# Altium PCB pcb.PcbDoc
Units mil, origin at the board's own origin, x right, y up, seen from the top; angles counter-clockwise.
Board outline 1435 x 2068 mil, 2 copper layers (Top Layer, Bottom Layer); 34 components, 70 nets, 198 pads, 6 vias.
Unrouted connection lines stored in the file: 12.
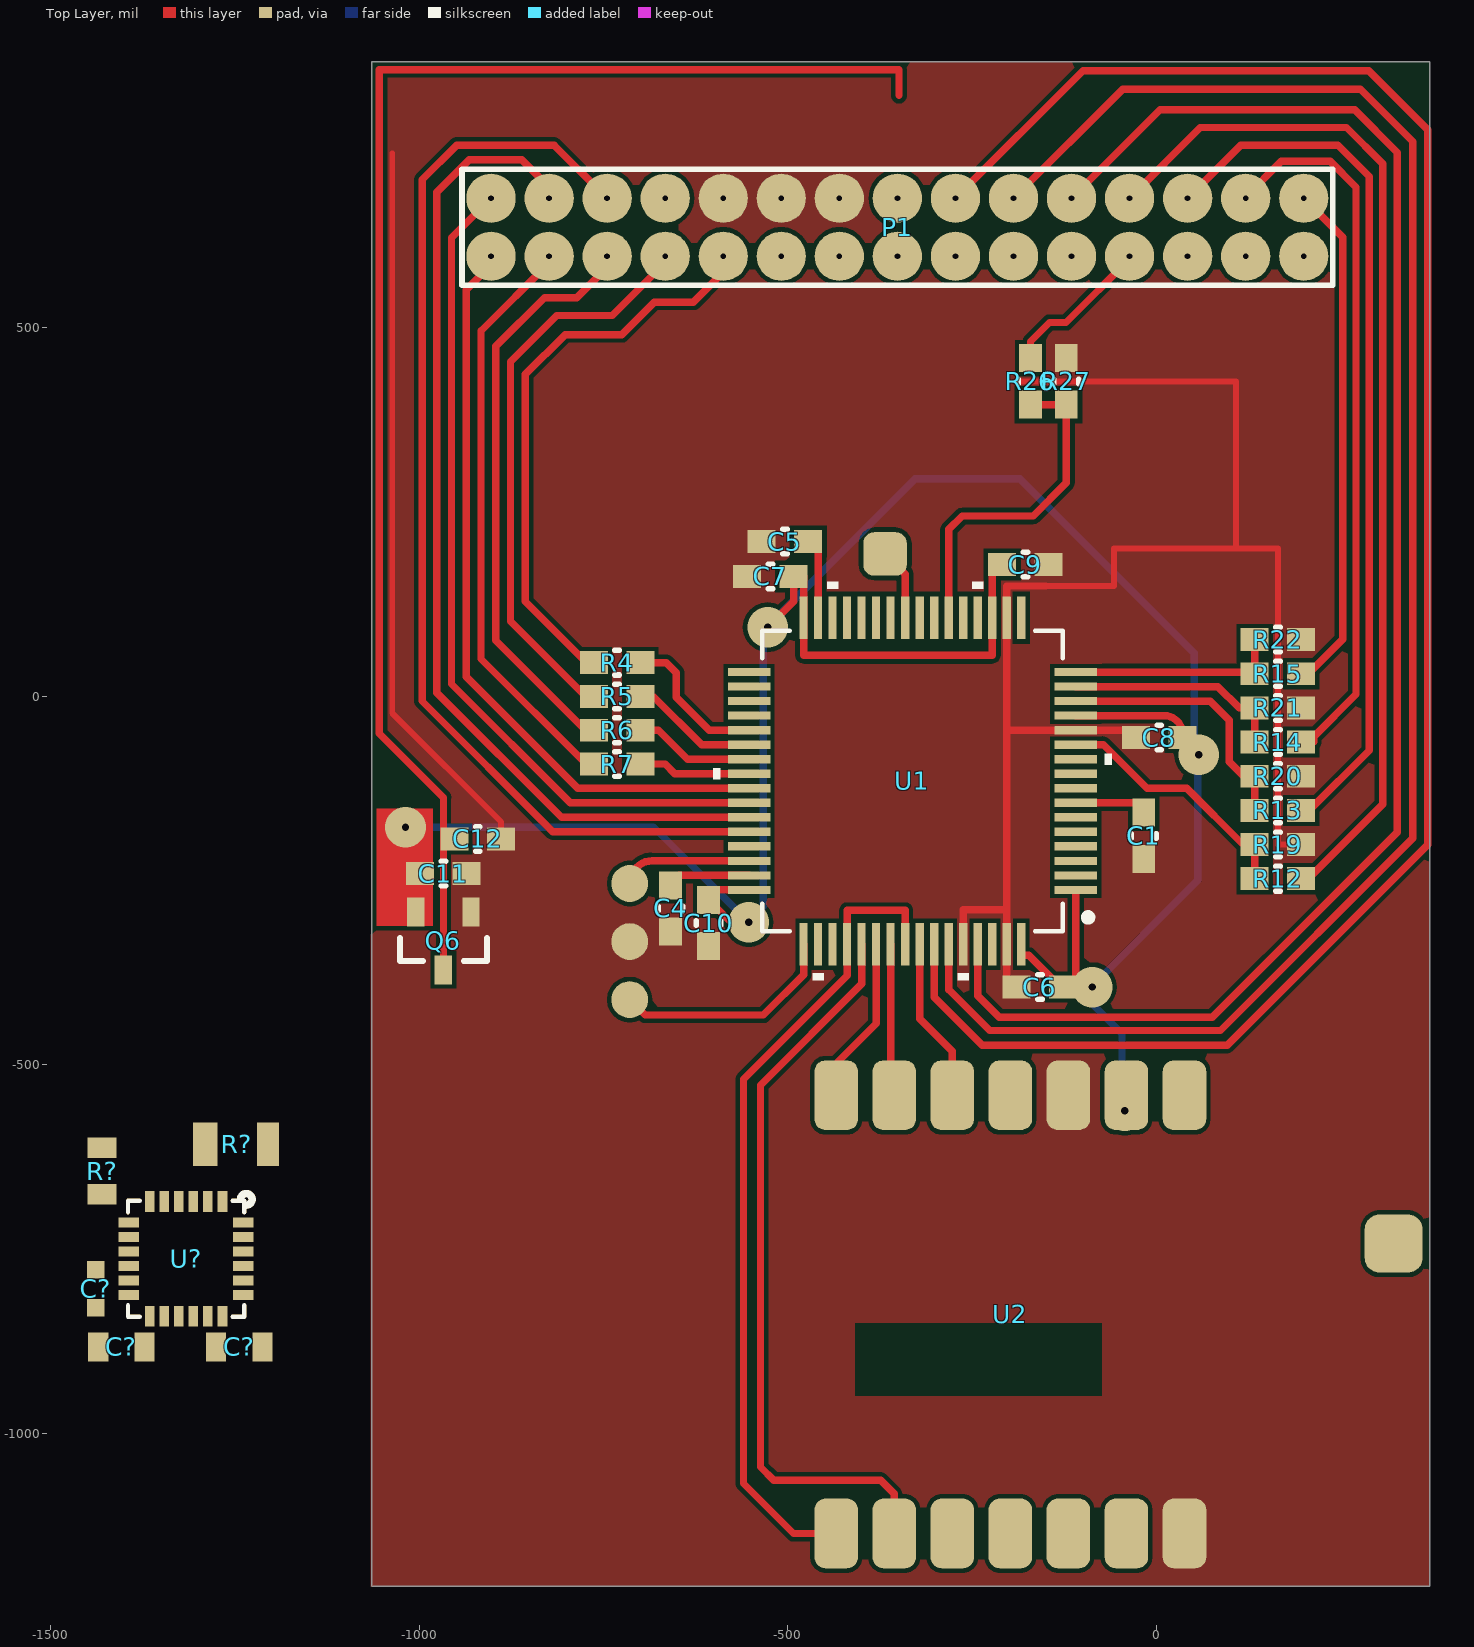
[diagram p0: Top Layer view]
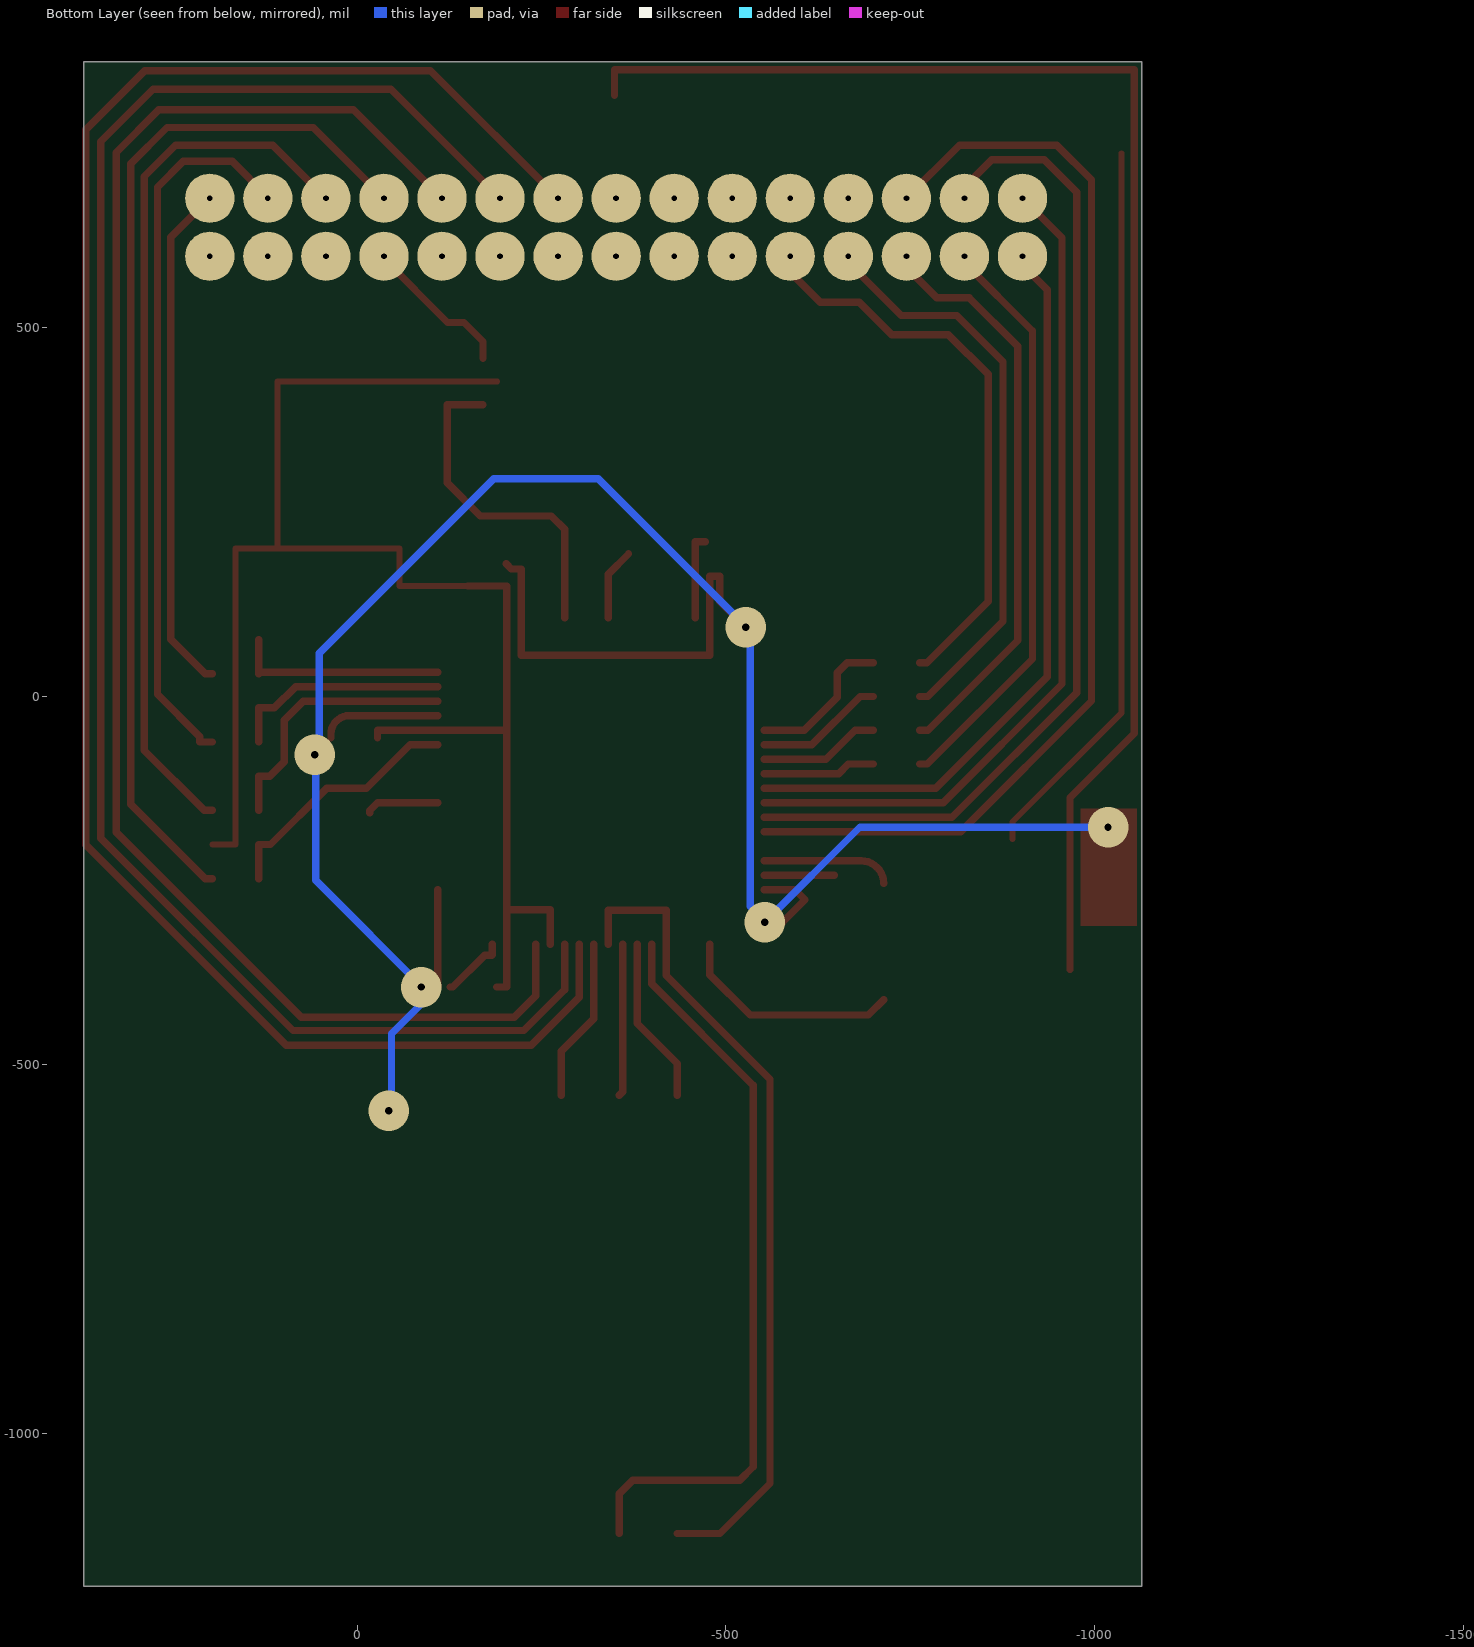
[diagram p1: Bottom Layer view, seen from below]

## Layer stack, top to bottom
Top Solder: solder mask 0.4, Solder Resist, Dk 3.5
Top Layer: signal copper 1.4
Dielectric 1: dielectric 12.6, FR-4, Dk 4.8
Bottom Layer: signal copper 1.4
Bottom Solder: solder mask 0.4, Solder Resist, Dk 3.5

## Board outline
-1064,-1207 -1064,861 371,861 371,-1207

## Design rules (kind name [scope] priority, off if disabled: settings)
Clearance [All] p1: gap=6 ignorepadtopadclearanceinfootprint=FALSE
PolygonConnect [All] p1: connectstyle=Direct reliefconductorwidth=10 reliefentries=4 polygonreliefangle="90 Angle" airgapwidth=10
RoutingVias [All] p1: holewidth=28 width=50 viastyle="Through Hole" minholewidth=28 minwidth=50 maxholewidth=28 maxwidth=50
SolderMaskExpansion [All] p1: expansion=4
Width [All] p1: maxlimit=500 minlimit=2 preferedwidth=10
30 further rules are at their usual default settings.

## Classes and differential pairs
component class main: C1 C4 C5 C6 C7 C8 C9 C10 C11 C12 C? P1 Q6 R4 R5 R6 R7 R12 R13 R14 R15 R19 R20 R21 R22 R26 R27 R? U1 U2 U?

## Components (designator, comment, footprint, x,y, rotation, side; value= is the part's Value field where it differs from the comment)
C1 "Cap" RC_0603 -16.91,-189.35 r90 top value=100pF
C4 "Cap" RC_0603 -658.91,-287.77 r90 top value=100pF
C5 "Cap" RC_0603 -503.65,209.87 r0 top value=100pF
C6 "Cap" RC_0603 -157.74,-394.32 r0 top value=100pF
C7 "Cap" RC_0603 -523.33,162.68 r0 top value=100pF
C8 "Cap" RC_0603 4.09,-55.92 r0 top value=100pF
C9 "Cap" RC_0603 -177.43,178.68 r180 top value=100pF
C10 "Cap" RC_0603 -607.28,-307.46 r90 top value=100pF
C11 "Cap" RC_0603 -966.91,-240.32 r180 top value=100pF
C12 "Cap" RC_0603 -920.41,-193.32 r180 top value=100pF
C? "Cap402" 0402x -1438.83,-803.56 r270 top value=100nF
C? "Cap603" 0603x -1243.83,-882.56 r0 top value=2.2nF
C? "Cap402" 0603x -1403.83,-882.56 r0 top value=100nF
P1 "Header 15X2" HDR2X15-2mm -351.15,636.31 r180 top
Q6 "IRLML2502" RR_SOT-23 -966.91,-331.64 r270 top value="MOSFET N-CH 20V 4.2A SOT-23-3"
R4 "Res1" RR_0603 -731.41,45.68 r180 top value=1K
R5 "Res1" RR_0603 -731.41,-0.15 r180 top value=1K
R6 "Res1" RR_0603 -731.41,-45.99 r180 top value=1K
R7 "Res1" RR_0603 -731.41,-91.82 r180 top value=1K
R12 "Res1" RR_0603 165.09,-247.32 r0 top value=1K
R13 "Res1" RR_0603 165.09,-154.65 r0 top value=1K
R14 "Res1" RR_0603 165.09,-61.99 r0 top value=1K
R15 "Res1" RR_0603 165.09,30.68 r0 top value=1K
R19 "Res1" RR_0603 165.09,-200.99 r180 top value=1K
R20 "Res1" RR_0603 165.09,-108.32 r180 top value=1K
R21 "Res1" RR_0603 165.09,-15.65 r180 top value=1K
R22 "Res1" RR_0603 165.09,77.01 r180 top value=1K
R26 "Res1" RR_0603 -170.63,427.18 r90 top value=1K
R27 "Res1" RR_0603 -122.09,427.18 r270 top value=1K
R? "Res1" 0805x -1247.83,-607.56 r180 top value=1K
R? "Res1" 0603x -1430,-644 r270 top value=1K
U1 "STM32F405RGT6" RR_LQFP-64 -330.69,-114.82 r180 top value="IC MCU 32BIT 1MB FLASH 64LQFP"
U2 "RFM12B" RFM12B -197.91,-838.32 r90 top
U? "MPU-6000" IMU-3000 -1316,-763 r270 top

## Footprints (in the part's own frame and the unit in brackets; to place one, negate y for a bottom-side part, rotate by r counter-clockwise, add the part's x,y. Pads: shape width x height; smd on the part's side, far side on the other; paste and mask are expansions set on the pad)
0402x [mm] "Chip Capacitor, Body 1.0x0.5mm, IPC Medium Density"
  rect 0.6x0.6 smd: 1(-0.66,0) 2(0.66,0)
  body extent -0.5,-0.25 0.5,0.25, height 0.6
0603x [mm] "Chip Resistor; Body 1.6 x 0.8 mm (LxW typ)"
  rect 0.7x1 smd: 1(-0.8,0) 2(0.8,0)
0805x [mil] "Chip Resistor; Body 2 x 1.3 mm (LxW typ)"
  rect 33x59.06 smd: 1(42,0)
  rect 30x59.06 smd: 2(-43,0)
HDR2X15-2mm [mm] "Connector; Header; 30x2 Position"
  round 1.7 hole 0.2: 1(-14,-1) 2(-14,1) 3(-12,-1) 4(-12,1) 5(-10,-1) 6(-10,1) 7(-8,-1) 8(-8,1) 9(-6,-1) 10(-6,1) 11(-4,-1) 12(-4,1) 13(-2,-1) 14(-2,1) 15(0,-1) 16(0,1) 17(2,-1) 18(2,1) 19(4,-1) 20(4,1) 21(6,-1) 22(6,1) 23(8,-1) 24(8,1) 25(10,-1) 26(10,1) 27(12,-1) 28(12,1) 29(14,-1) 30(14,1)
  silkscreen extent -15,-2 15,2
IMU-3000 [mm]
  rect 0.711x0.337 smd paste-0.03 mask+0.04: 1(-1.975,1.25) 2(-1.975,0.75) 3(-1.975,0.25) 4(-1.975,-0.25) 5(-1.975,-0.75) 6(-1.975,-1.25) 13(1.975,-1.25) 14(1.975,-0.75) 15(1.975,-0.25) 16(1.975,0.25) 17(1.975,0.75) 18(1.975,1.25)
  rect 0.337x0.711 smd paste-0.03 mask+0.04: 7(-1.25,-1.975) 8(-0.75,-1.975) 9(-0.25,-1.975) 10(0.25,-1.975) 11(0.75,-1.975) 12(1.25,-1.975) 19(1.25,1.975) 20(0.75,1.975) 21(0.25,1.975) 22(-0.25,1.975) 23(-0.75,1.975) 24(-1.25,1.975)
  silkscreen extent -2.25,-2 2,2.27, body extent -2,-2 2,2, height 0.95
RC_0603 [mil] "Chip Capacitor"
  rect 38x31 smd: 1(-31.5,0) 2(31.5,0)
  silkscreen extent -3,-17 3,17, body extent -33,-18 33,18, height 35
RFM12B [mm]
  rrect50% 2.4x1.5 smd: 1(-7.55,6) 2(-7.55,4) 3(-7.55,2) 4(-7.55,0) 5(-7.55,-2) 6(-7.55,-4) 7(-7.55,-6) 8(7.55,-6) 9(7.55,-4) 10(7.55,-2) 11(7.55,0) 12(7.55,2) 13(7.55,4) 14(7.55,6)
  Top Layer pour cut-out: -2.8,-3.15 -0.3,-3.15 -0.3,5.35 -2.8,5.35
  body extent -7.95,-8.05 7.95,8.05, height 0.25
RR_0603 [mil] "Chip Resistor; Body 1.6 x 0.8 mm (LxW typ)"
  rect 38x31 smd: 1(-31.5,0) 2(31.5,0)
  silkscreen extent -3,-17 3,17, body extent -33,-18 33,18, height 22
RR_LQFP-64 [mil]
  rect 58x11 smd: 1(-221.5,147.64) 2(-221.5,127.95) 3(-221.5,108.27) 4(-221.5,88.58) 5(-221.5,68.9) 6(-221.5,49.21) 7(-221.5,29.53) 8(-221.5,9.84) 9(-221.5,-9.84) 10(-221.5,-29.53) 11(-221.5,-49.21) 12(-221.5,-68.9) 13(-221.5,-88.58) 14(-221.5,-108.27) 15(-221.5,-127.95) 16(-221.5,-147.64) 33(221.5,-147.64) 34(221.5,-127.95) 35(221.5,-108.27) 36(221.5,-88.58) 37(221.5,-68.9) 38(221.5,-49.21) 39(221.5,-29.53) 40(221.5,-9.84) 41(221.5,9.84) 42(221.5,29.53) 43(221.5,49.21) 44(221.5,68.9) 45(221.5,88.58) 46(221.5,108.27) 47(221.5,127.95) 48(221.5,147.64)
  rect 11x58 smd: 17(-147.64,-221.5) 18(-127.95,-221.5) 19(-108.27,-221.5) 20(-88.58,-221.5) 21(-68.9,-221.5) 22(-49.21,-221.5) 23(-29.53,-221.5) 24(-9.84,-221.5) 25(9.84,-221.5) 26(29.53,-221.5) 27(49.21,-221.5) 28(68.9,-221.5) 29(88.58,-221.5) 30(108.27,-221.5) 31(127.95,-221.5) 32(147.64,-221.5) 49(147.64,221.5) 50(127.95,221.5) 51(108.27,221.5) 52(88.58,221.5) 53(68.9,221.5) 54(49.21,221.5) 55(29.53,221.5) 56(9.84,221.5) 57(-9.84,221.5) 58(-29.53,221.5) 59(-49.21,221.5) 60(-68.9,221.5) 61(-88.58,221.5) 62(-108.27,221.5) 63(-127.95,221.5) 64(-147.64,221.5)
  silkscreen extent -271,-270 270,270, body extent -236,-236 236,236, height 59
RR_SOT-23 [mm] "SOT23, 3-Leads, Body 2.9x1.3mm, Pitch 0.95mm, Lead Span 2.3mm, IPC High Density"
  rect 1x0.6 smd: 1(-1,0.95) 2(-1,-0.95) 3(1,0)
  silkscreen extent -0.1,-1.5 0.7,1.5, body extent -1.33,-1.5 1.27,1.5, height 1.1

## Part data
C1 C4 C5 C6 C7 C8 C9 C10 C11 C12: "Capacitor", LatestRevisionDate=17-Jul-2002, LatestRevisionNote="Re-released for DXP Platform.", PackageDescription="Radial Cap, Thru-Hole; 2 Leads; 0.3 in Pin Spacing", PackageReference=RAD-0.3, Published=8-Jun-2000, Publisher="Altium Limited"
C? C?: "Capacitor SMD", Supplier Part Number 1=445-4952-1-ND, ComponentLink2Description=Datasheet, LatestRevisionDate=1-Nov-2010, LatestRevisionNote="Released OpenPilot Lib", PackageReference="0402 (1005 Metric)", Published=1-Nov-2010, Publisher="The OpenPilot Project", Supplier 1=Digi-Key
C?: "Capacitor SMD", Supplier Part Number 1=445-1309-1-ND, LatestRevisionDate=1-Nov-2010, LatestRevisionNote="Released OpenPilot Lib", PackageReference="0603 (1608 Metric)", Published=1-Nov-2010, Publisher="The OpenPilot Project", Supplier 1=Digi-Key
P1: "Header, 15-Pin, Dual row", LatestRevisionDate=17-Jul-2002, LatestRevisionNote="Re-released for DXP Platform.", Publisher="Altium Limited"
Q6: "MOSFET N-CH 20V 4.2A SOT-23-3", Manufacturer="Infineon Technologies", Package=SOT-23, Cost=0,52, Order Number="IRLML2502GTRPBF ( IRLML6246TRPBF (INFIN))"
R4 R5 R6 R7 R12 R13 R14 R15 R19 R20 R21 R22 R26 R27 R? R?: "Resistor", LatestRevisionDate=17-Jul-2002, LatestRevisionNote="Re-released for DXP Platform.", PackageDescription="Axial Device, Thru-Hole; 2 Leads; 0.3 in Pin Spacing", PackageReference=AXIAL-0.3, Published=8-Jun-2000, Publisher="Altium Limited"
U1: "MCU STM32F405RGT6", Manufacturer="ST Microelectronics", Package=64-LQFP, Cost=10,58, Order Number=STM32F405RGT6
U2: library part Component_1
U?: library part MPU-3/6000, "Invensense MPU-3/6000,  3-axis Gyros & Accel on 6000", Manufacturer=Invensense, ComponentLink2Description=Datasheet, LatestRevisionDate=1-Nov-2010, LatestRevisionNote="Released OpenPilot Lib", Published=1-Nov-2010, Publisher="The OpenPilot Project", Supplier 1=Invensense, Supplier Part Number 1=MPU-6000

## Free pads (board coordinates)
  round 50 smd: 1(-714.24,-411.36) 1(-714.24,-332.62) 1(-714.24,-253.88)
  rrect50% 59.06x59.06 smd: 2(-367.91,193.18)
  rrect50% 78.74x78.74 smd: 2(322.09,-742.32)

## Via types
v1: diameter 55, hole 10, Top Layer to Bottom Layer, 6 vias

## Nets (pads, with @x,y where several pads share a name; then routed paths per layer and width w, separated by ;. In a path a pad name is that pad's centre, name@x,y a point inside that pad or via, vN(x,y) a via of type N, cw(c..) or ccw(c..) an arc to the next point about the centre after c; other vN are vias at no path point)
3.3V: C?.2@-1372.33,-882.56 U?.13
3V3: C6.2 C7.2 C8.2 C9.2 C10.2 C11.2 Q6.2 U1.1 U1.13 U1.19 U1.32 U1.48 U1.64 U2.9 | length 3508.5
  Top Layer w10: v1@-1006.91,-177.32 v1@-1004.31,-179.92 ; v1(-552.91,-306.32) -576.92,-306.32 C10.2 -593.78,-262.46 U1.48 ; v1(-526.91,93.68) -491.83,128.75 C7.2 -478.33,162.68 U1.32 -478.33,55.68 -222.43,55.68 U1.19 -222.43,172.68 -208.93,172.68 C9.2@-201.91,179.7 ; U1.64 -183.06,-350.46 -182.56,-350.96 -173.1,-350.96 -129.74,-394.32 C6.2 ; C6.2@-109.19,-394.32 U1.1 ; U1.13 11.09,-26.24 cw(c11.09,-50.74) 35.59,-50.74 C8.2
  Bottom Layer w10: v1(-1018.41,-177.32) -681.91,-177.32 -553.61,-305.61 v1(-552.91,-306.32) ; v1@-559,-311 -533,-285 -533,89 -327,295 -185,295 51.5,58.5 v1@51.5,-84.1 ; v1@-46.52,-545.76 -46.52,-457.48 -101,-403 -97,-399 -93,-399 56.5,-249.5 v1@56.5,-84.1
  other v1: -42.91,-562.32 -86.91,-394.32 57.59,-79.42
5V: C12.2 P1.15 Q6.3 | length 1997
  Top Layer w9: Q6.3 -966.91,-137.32
  Top Layer w10: -966.91,-137.32 -1053.91,-50.32 -1053.91,850 -349,850 -349,815
_FAN0: P1.18
_FAN1: P1.20
_LED0: P1.14
_LED1: P1.16
_LED2: P1.23
_SAIN0: P1.7 R12.2 | length 1424.7
  Top Layer w10: P1.7 59.81,771.68 258.09,771.68 307.09,722.68 307.09,-146.32 206.1,-247.32 R12.2
_SAIN1: P1.5 R13.2 | length 1198.5
  Top Layer w10: P1.5 114.55,747.68 246.47,747.68 289.03,705.12 289.03,-73.39 207.76,-154.65 R13.2
_SAIN2: P1.3 R14.2 | length 979.3
  Top Layer w10: P1.3 121.29,677.38 169.59,725.68 236.09,725.68 270.96,690.81 270.96,2.82 213.43,-54.71 213.43,-61.99 R14.2
_SAIN3: P1.1 R15.2 | length 695.8
  Top Layer w10: R15.2 206.09,30.68 252.89,77.48 252.89,622.82 P1.1
_SAIN4: P1.2
_SAIN5: P1.4
_SAIN6: P1.6
_VBat: P1.8 R26.2 | length 207
  Top Layer w10: R26.2 -170.63,481.32 -144.77,507.18 -122.41,507.18 -36.19,593.4 P1.8
A_C\S\: R?.1@-1289.83,-607.56
A_MISO: U?.9
A_MOSI: U?.24
A_SCK: R?.1@-1430,-612.5
ADC0: R12.1 R19.2 U1.11 | length 345.2
  Top Layer w10: U1.11 -71.62,-65.61 -12.56,-124.66 41.44,-124.66 117.76,-200.99 R19.2 R12.1
ADC1: R13.1 R20.2 U1.14 | length 364.2
  Top Layer w10: U1.14 73.33,-6.55 99.2,-32.43 99.2,-88.59 118.94,-108.32 R20.2 R13.1
ADC2: R14.1 R21.2 U1.15 | length 301
  Top Layer w10: U1.15 83.64,13.13 112.43,-15.65 R21.2 R14.1
ADC3: R15.1 R22.2 U1.16 | length 290
  Top Layer w10: U1.16 131.46,32.82 R15.1 R22.2
ADC4: U1.17
ADC5: U1.20
ADC6: U1.21
ADC7: R26.1 R27.2 U1.22 | length 460
  Top Layer w10: U1.22 -281.48,226.49 -263.29,244.68 -166.91,244.68 -122.09,289.5 R27.2 R26.1
ADC8: U1.23
ADC9: U1.24
ADC10: pad.2@-367.91,193.18 U1.25 | length 97.8
  Top Layer w10: pad.2@-367.91,193.18 -340.54,165.81 U1.25
ADC11: U1.26
ADC12: U1.27
ANT: pad.2@322.09,-742.32 U2.8
C\S\: U1.54 U2.14 | length 227.2
  Top Layer w10: U2.14 -434.13,-498.05 -379.91,-443.83 U1.54
FAN0: U1.35
FAN1: U1.36
GND: C1.1 C4.1 C5.1 C6.1 C7.1 C8.1 C9.1 C10.1 C11.1 C12.1 C?.1@-1275.32,-882.56 C?.1@-1435.32,-882.56 C?.2@-1438.83,-829.56 P1.17 P1.19 P1.21 pad.1@-714.24,-332.62 Q6.1 R19.1 R20.1 R21.1 R22.1 R27.1 U1.12 U1.18 U1.60 U1.63 U2.7 U2.10 U?.1 U?.11 U?.18 | length 3216.5
  Top Layer w8: -1036.41,736.68 -1036.41,-22.82 -888.91,-170.32 C12.1 ; -189.91,427.18 108.09,427.18 108.09,200.68 ; -149.91,149.68 -57.31,149.68 -57.31,200.68 108.09,200.68 ; R19.1 165.09,-200.99 165.09,169.68 165.09,200.68 108.09,200.68
  Top Layer w10: U1.60 -261.8,-289.32 -202.74,-289.32 ; C6.1 -202.74,-394.32 U1.63 -202.74,-289.32 ; -149.91,149.68 -202.74,149.68 U1.18 -202.74,-45.92 ; C8.1 -27.41,-45.92 U1.12 -202.74,-45.92 ; -202.74,-289.32 -202.74,-45.92
I\R\Q\: U1.53 U2.2 | length 1016.2
  Top Layer w10: U1.53 -399.59,-390.01 -536.91,-527.32 -536.91,-1045.32 -518.91,-1063.32 -373.91,-1063.32 -355.39,-1081.84 U2.2
LED0: U1.29
LED1: U1.30
LED2: U1.50
MISO: U1.52 U1.56 U2.1 | length 1114.3
  Top Layer w10: U2.1 -492.11,-1135.56 -559.91,-1067.77 -559.91,-519.32 -419.28,-378.69 U1.52 -419.28,-290.32 -340.54,-290.32 U1.56
MOSI: U1.57 U2.12 | length 223.1
  Top Layer w10: U1.57 -320.85,-437.38 -276.65,-481.58 U2.12
NetC1_2: C1.2 U1.7 | length 99.6
  Top Layer w10: U1.7 -27.41,-144.35 -16.91,-154.85 C1.2
NetC4_2: C4.2 U1.47 | length 94.7
  Top Layer w10: C4.2@-646.91,-242.77 U1.47
NetC5_2: C5.2 U1.31 | length 116.7
  Top Layer w10: C5.2 -458.65,209.87 U1.31
NetC?_1: C?.1@-1438.83,-777.56 U?.10
NetC?_2: C?.2@-1212.33,-882.56 U?.20
NetR4_1: R4.1 U1.37 | length 205.2
  Top Layer w10: R4.1 -664.55,45.68 -650.91,32.04 -650.91,-1.32 -606.3,-45.92 U1.37
NetR5_1: R5.1 U1.38 | length 174.8
  Top Layer w10: R5.1 -682.18,-0.15 -616.73,-65.61 U1.38
NetR6_1: R6.1 U1.39 | length 164
  Top Layer w10: R6.1 -675.12,-45.99 -635.82,-85.29 U1.39
NetR7_1: R7.1 U1.40 | length 153.2
  Top Layer w10: R7.1 -666.06,-91.82 -652.91,-104.98 U1.40
NetR?_2: R?.2@-1204.83,-607.56 U?.8
NTC1: P1.10
NTC2: P1.12
SCK: U1.55 U2.13 | length 206.8
  Top Layer w10: U1.55 -360.22,-536.24 U2.13
SIN0: P1.22 R4.2 | length 783
  Top Layer w10: R4.2 -772.91,45.68 -855.91,128.68 -855.91,436.68 -801.91,490.68 -724.91,490.68 -680.91,534.68 -627.91,534.68 -587.37,575.21 P1.22
SIN1: P1.24 R5.2 | length 781.5
  Top Layer w10: R5.2 -774.07,-0.15 -875.91,101.68 -875.91,454.04 -813.27,516.68 -737.91,516.68 -666.11,588.47 P1.24
SIN2: P1.26 R6.2 | length 792.8
  Top Layer w10: R6.2 -774.24,-45.99 -895.91,75.68 -895.91,474.68 -829.91,540.68 -786.24,540.68 -744.85,582.07 P1.26
SIN3: P1.28 R7.2 | length 796.5
  Top Layer w10: P1.28 -823.59,587.99 -915.91,495.68 -915.91,50.68 -773.41,-91.82 R7.2
SRV0: P1.30 U1.41 | length 1030.6
  Top Layer w10: P1.30 -902.33,584.94 -935.91,551.37 -935.91,26.68 -784.56,-124.66 U1.41
SRV1: P1.29 U1.42 | length 1151.6
  Top Layer w10: P1.29 -955.91,622.1 -955.91,16.68 -794.88,-144.35 U1.42
SRV2: P1.27 U1.43 | length 1373.1
  Top Layer w10: P1.27 -823.59,690.36 -860.91,727.68 -931.91,727.68 -975.91,683.68 -975.91,5.05 -806.82,-164.03 U1.43
SRV3: P1.25 U1.44 | length 1524.6
  Top Layer w10: P1.25 -816.85,747.68 -949.07,747.68 -995.91,700.84 -995.91,-6.32 -818.51,-183.72 U1.44
SRV4: P1.13 U1.58 | length 2596
  Top Layer w10: U1.58 -301.17,-408.06 -235.91,-473.32 96.09,-473.32 368.09,-201.32 368.09,768.68 288.09,848.68 -99.41,848.68 P1.13
SRV5: P1.11 U1.59 | length 2399.6
  Top Layer w10: U1.59 -281.48,-397.75 -225.91,-453.32 87.09,-453.32 348.09,-192.32 348.09,752.68 277.09,823.68 -45.67,823.68 P1.11
SRV6: P1.9 U1.61 | length 2192.8
  Top Layer w10: U1.61 -242.11,-406.12 -212.91,-435.32 76.09,-435.32 327.09,-184.32 327.09,737.68 269.09,795.68 5.07,795.68 P1.9
SWCLK: pad.1@-714.24,-411.36 U1.49 | length 308.6
  Top Layer w10: pad.1@-714.24,-411.36 -693.28,-432.32 -532.91,-432.32 -478.33,-377.75 U1.49
SWDIO: pad.1@-714.24,-253.88 U1.46 | length 179.6
  Top Layer w10: pad.1@-714.24,-253.88 cw(c-683.45,-253.88) -683.45,-223.09 U1.46
pads on no net: R?.2@-1430,-675.5 U1.2 U1.3 U1.4 U1.5 U1.6 U1.8 U1.9 U1.10 U1.28 U1.33 U1.34 U1.45 U1.51 U1.62 U2.3 U2.4 U2.5 U2.6 U2.11 U?.2 U?.3 U?.4 U?.5 U?.6 U?.7 U?.12 U?.14 U?.15 U?.16 U?.17 U?.19 U?.21 U?.22 U?.23

## Polygon pours and split planes (outlines as drawn)
GND on Top Layer "Top Layer-GND" (solid, remove dead copper, pour order 0): 371.2,-1207.32 -1065.81,-1207.32 -1065.81,860.68 371.2,860.68

## Other copper
Top Layer:
  region net 3V3: -980.91,-152 -1057.91,-152 -1057.91,-311.32 -980.91,-311.32